# Altium PCB Ajchel_Jakub_plytka.PcbDoc
Units mm, origin at the board's own origin, x right, y up, seen from the top; angles counter-clockwise.
Board outline 95 x 67 mm, 2 copper layers (Top Layer, Bottom Layer), stack 1.571 mm thick; 48 components, 0 nets, 151 pads, 0 vias.
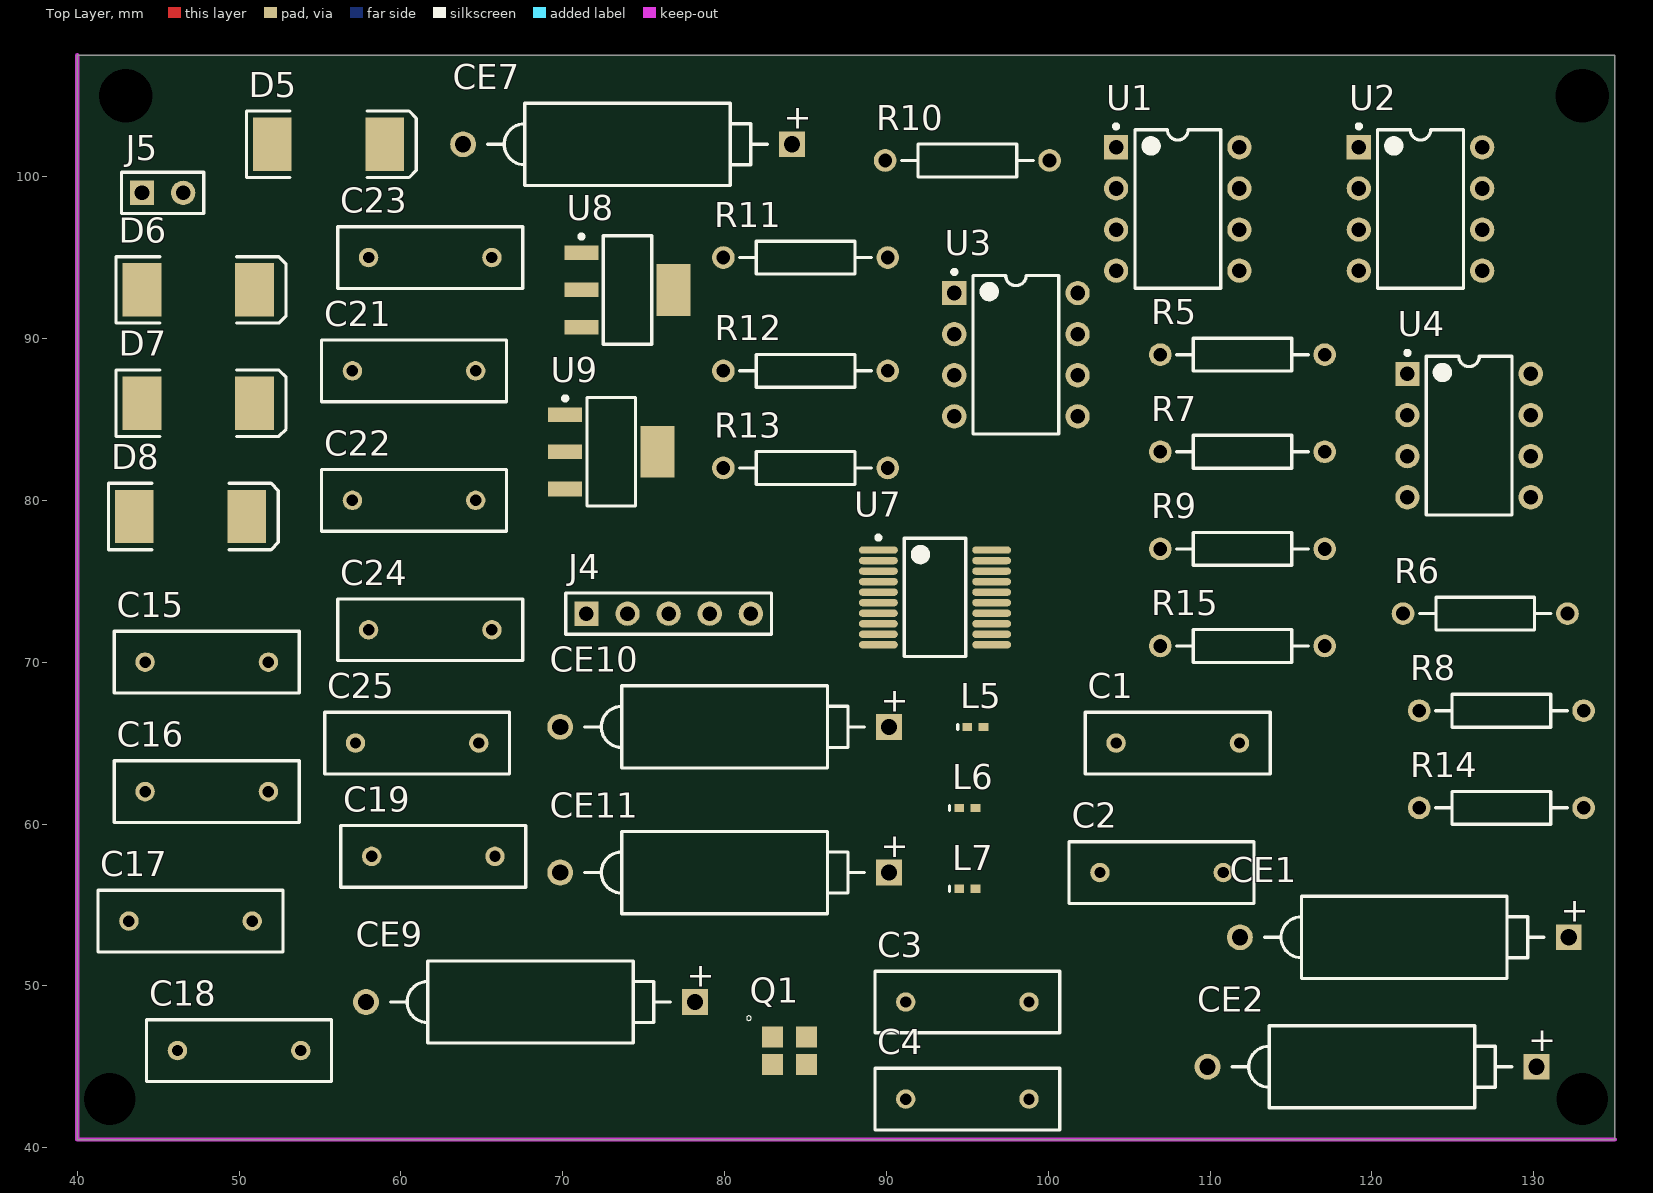
[diagram p0: Top Layer view]
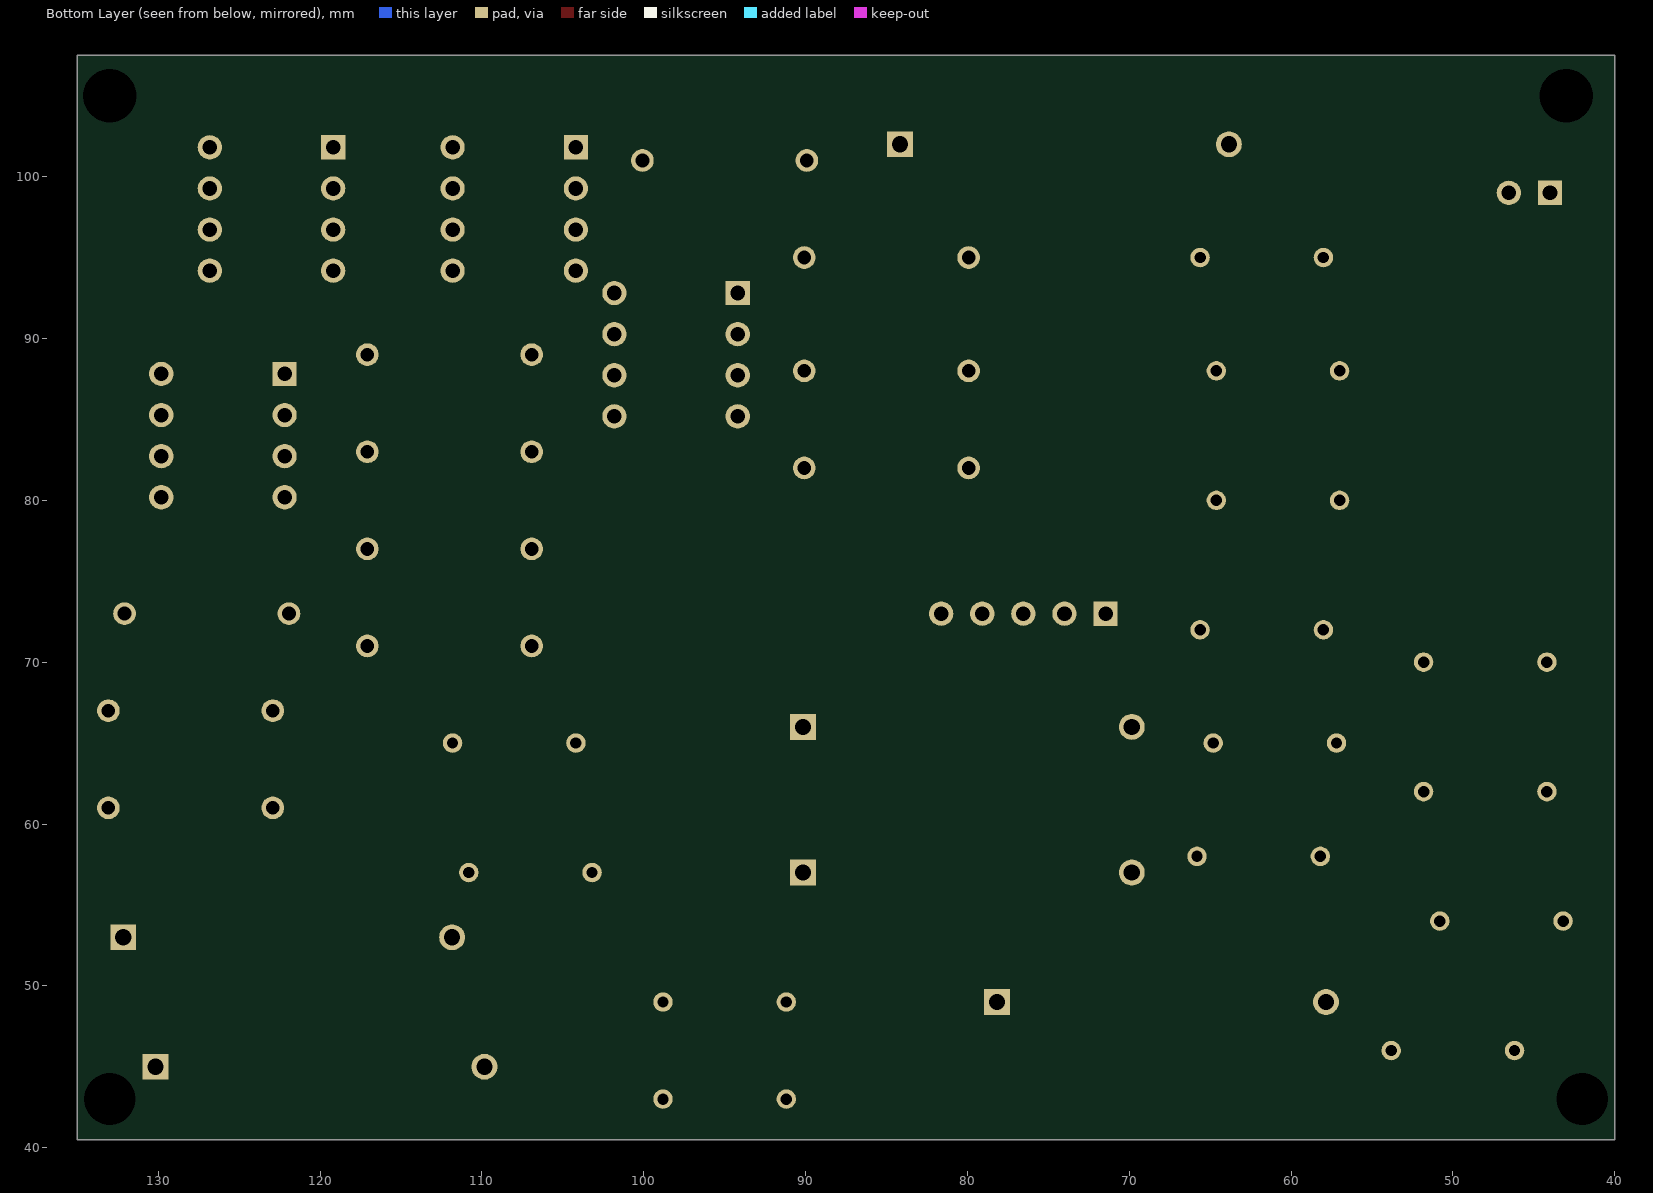
[diagram p1: Bottom Layer view, seen from below]

## Layer stack, top to bottom
Top Solder: solder mask 0.0102, Solder Resist, Dk 3.5
Top Layer: signal copper 0.0356
Dielectric 1: dielectric 1.5, FR-4, Dk 4.8
Bottom Layer: signal copper 0.0356
Bottom Solder: solder mask 0.0102, Solder Resist, Dk 3.5

## Board outline
40,40.5 40,107.5 135,107.5 135,40.5

## Design rules (kind name [scope] priority, off if disabled: settings)
Clearance [All] p1: gap=0.254 ignorepadtopadclearanceinfootprint=FALSE except(0: Arc-Hole Track-Hole SMDPad-Hole THPad-Hole Via-Hole Fill-Hole Poly-Hole Region-Hole Text-Hole)
PolygonConnect [All] p1: connectstyle=Relief reliefconductorwidth=0.254 reliefentries=4 polygonreliefangle="90 Angle" airgapwidth=0.254
RoutingVias [All] p1: holewidth=0.711 width=1.27 viastyle="Through Hole" minholewidth=0.711 minwidth=1.27 maxholewidth=0.711 maxwidth=1.27
SolderMaskExpansion [All] p1: expansion=0.102
Width [All] p1: maxlimit=0.254 minlimit=0.254 preferedwidth=0.254
30 further rules are at their usual default settings.

## Components (designator, comment, footprint, x,y, rotation, side; value= is the part's Value field where it differs from the comment)
C1 "Comment" RAD-0.3 108,65 r0 top
C2 "Comment" RAD-0.3 107,57 r0 top
C3 "Comment" RAD-0.3 95,49 r0 top
C4 "Comment" RAD-0.3 95,43 r0 top
C15 "Comment" RAD-0.3 48,70 r0 top
C16 "Comment" RAD-0.3 48,62 r0 top
C17 "Comment" RAD-0.3 47,54 r0 top
C18 "Comment" RAD-0.3 50,46 r0 top
C19 "Comment" RAD-0.3 62,58 r0 top
C21 "Comment" RAD-0.3 60.81,88 r0 top
C22 "Comment" RAD-0.3 60.81,80 r0 top
C23 "Comment" RAD-0.3 61.81,95 r0 top
C24 "Comment" RAD-0.3 61.81,72 r0 top
C25 "Comment" RAD-0.3 61,65 r0 top
CE1 "Comment" POLAR0.8 122,53 r0 top
CE2 "Comment" POLAR0.8 120,45 r0 top
CE7 "Comment" POLAR0.8 74,102 r0 top
CE9 "Comment" POLAR0.8 68,49 r0 top
CE10 "Comment" POLAR0.8 80,66 r0 top
CE11 "Comment" POLAR0.8 80,57 r0 top
D5 "Comment" SMC 55.525,102 r0 top
D6 "Comment" SMC 47.475,93 r0 top
D7 "Comment" SMC 47.475,86 r0 top
D8 "Comment" SMC 47,79 r0 top
J4 "Comment" HDR1X5 71.46,73 r0 top
J5 "Comment" HDR1X2 44,99 r0 top
L5 "Comment" 0402-A 95.5,66 r0 top
L6 "Comment" 0402-A 95,61 r0 top
L7 "Comment" 0402-A 95,56 r0 top
Q1 "Comment" "CTS 403" 84,46 r0 top
R5 "Comment" AXIAL-0.4 112,89 r0 top
R6 "Comment" AXIAL-0.4 127,73 r0 top
R7 "Comment" AXIAL-0.4 112,83 r0 top
R8 "Comment" AXIAL-0.4 128,67 r0 top
R9 "Comment" AXIAL-0.4 112,77 r0 top
R10 "Comment" AXIAL-0.4 95,101 r0 top
R11 "Comment" AXIAL-0.4 85,95 r0 top
R12 "Comment" AXIAL-0.4 85,88 r0 top
R13 "Comment" AXIAL-0.4 85,82 r0 top
R14 "Comment" AXIAL-0.4 128,61 r0 top
R15 "Comment" AXIAL-0.4 112,71 r0 top
U1 "Comment" DIP8 108,98 r0 top
U2 "Comment" DIP8 123,98 r0 top
U3 "Comment" DIP8 98,89 r0 top
U4 "Comment" DIP8 126,84 r0 top
U7 "Comment" SSOP20_M 93,74 r0 top
U8 "Comment" MP04A_L 74,93 r0 top
U9 "Comment" MP04A_L 73,83 r0 top

## Footprints (in the part's own frame and the unit in brackets; to place one, negate y for a bottom-side part, rotate by r counter-clockwise, add the part's x,y. Pads: shape width x height; smd on the part's side, far side on the other; paste and mask are expansions set on the pad)
0402-A [mm] "Chip Inductor, Body 1.0x0.5mm, IPC High Density"
  rect 0.6x0.5 smd: 1(-0.5,0) 2(0.5,0)
  silkscreen extent -1.1,-0.15 -1.1,0.15, body extent -0.55,-0.3 0.55,0.3, height 0.55
AXIAL-0.4 [mm] "Axial Device, Thru-Hole; 2 Leads; 0.4 in Pin Spacing"
  round 1.4 hole 0.85: 1(-5.08,0) 2(5.08,0)
  silkscreen extent -4.06,-1.02 4.06,1.02
"CTS 403" [mm]
  rect 1.3x1.3 smd: 1(-1.05,0.85) 2(-1.05,-0.85) 3(1.05,-0.85) 4(1.05,0.85)
  silkscreen extent -2.64,1.86 -2.36,2.14, body extent -1.6,-1.25 1.6,1.25, height 0.77
DIP8 [mm] "DIP, 8-Leads, Row Spacing 7.62mm, Pitch 2.54mm, Body 9.33x6.35mm"
  rect 1.5x1.5 hole 0.9: 1(-3.81,3.81)
  round 1.5 hole 0.9: 2(-3.81,1.27) 3(-3.81,-1.27) 4(-3.81,-3.81) 5(3.81,-3.81) 6(3.81,-1.27) 7(3.81,1.27) 8(3.81,3.81)
  silkscreen extent -3.93,-4.9 2.65,5.23, body extent -3.3,-4.9 3.3,4.9, height 5.08
HDR1X2 [mm] "Connector; Header; 2 Position"
  rect 1.5x1.5 hole 0.9: 1(0,0)
  round 1.5 hole 0.9: 2(2.54,0)
  silkscreen extent -1.27,-1.27 3.81,1.27
HDR1X5 [mm] "Connector; Header; 5 Position"
  rect 1.5x1.5 hole 0.9: 1(0,0)
  round 1.5 hole 0.9: 2(2.54,0) 3(5.08,0) 4(7.62,0) 5(10.16,0)
  silkscreen extent -1.27,-1.27 11.43,1.27
MP04A_L [mm] "SOT223, 4-Leads, Body 6.5x3.5mm, Pitch 2.3mm, Lead Span 7mm, IPC High Density"
  rect 2.1x0.9 smd: 1(-2.85,2.3) 2(-2.85,0) 3(-2.85,-2.3)
  rect 2.1x3.2 smd: 4(2.85,0)
  silkscreen extent -2.97,-3.35 1.5,3.42, body extent -1.86,-3.35 1.86,3.35, height 1.8
POLAR0.8 [mm] "Polarized Capacitor; 2 Leads"
  rect 1.6x1.6 hole 1: 1(10.16,0)
  round 1.6 hole 1: 2(-10.16,0)
  silkscreen extent -8.64,-2.54 8.64,2.54
RAD-0.3 [mm] "Radial Cap, Thru-Hole; 2 Leads; 0.3 in Pin Spacing"
  round 1.2 hole 0.7: 1(-3.81,0) 2(3.81,0)
  silkscreen extent -5.71,-1.91 5.71,1.91
SMC [mm] "DO-214-AB/SMC; 2 C-Bend Leads; Body 7.9 x 5.9 mm, inc. leads (LxW)"
  rect 2.4x3.3 smd: 1(-3.475,0) 2(3.475,0)
  silkscreen extent -5.07,-2.05 5.43,2.05
SSOP20_M [mm] "SOP, 20-Leads, Body 7.2x5.29mm, Pitch 0.65mm, IPC Low Density"
  oval 2.4x0.45 smd: 1(-3.5,2.925) 2(-3.5,2.275) 3(-3.5,1.625) 4(-3.5,0.975) 5(-3.5,0.325) 6(-3.5,-0.325) 7(-3.5,-0.975) 8(-3.5,-1.625) 9(-3.5,-2.275) 10(-3.5,-2.925) 11(3.5,-2.925) 12(3.5,-2.275) 13(3.5,-1.625) 14(3.5,-0.975) 15(3.5,-0.325) 16(3.5,0.325) 17(3.5,0.975) 18(3.5,1.625) 19(3.5,2.275) 20(3.5,2.925)
  silkscreen extent -3.62,-3.65 1.9,3.82, body extent -2.69,-3.66 2.69,3.67, height 1.98

## Part data
C15 C16 C17 C18 C19 C21 C22 C23 C24 C25: library part Cap, "Capacitor"
CE7 CE10 CE11: library part "Cap Pol2", "Polarized Capacitor (Axial)"
D5 D6 D7 D8: library part D-AK-2
J4: library part "Header 5", "Header, 5-Pin"
J5: library part "Header 2", "Header, 2-Pin"
L5 L6 L7: library part Inductor, "Inductor"
Q1: library part Oscilator12mhz, "Oscilator 12MHz"
R10 R11 R12 R13: library part Res2, "Resistor"
U7: library part WM8804
U8 U9: library part PM-REG-LM1086ADJ-SOT4

## Free pads (board coordinates)
  round 1.524 hole 3.3 unplated: 1(43,105) 4(133,105)
  round 1.524 hole 3.2 unplated: 2(42,43) 3(133,43)

## Nets (pads, with @x,y where several pads share a name; then routed paths per layer and width w, separated by ;. In a path a pad name is that pad's centre, name@x,y a point inside that pad or via, vN(x,y) a via of type N, cw(c..) or ccw(c..) an arc to the next point about the centre after c; other vN are vias at no path point)
pads on no net: C1.1 C1.2 C2.1 C2.2 C3.1 C3.2 C4.1 C4.2 C15.1 C15.2 C16.1 C16.2 C17.1 C17.2 C18.1 C18.2 C19.1 C19.2 C21.1 C21.2 C22.1 C22.2 C23.1 C23.2 C24.1 C24.2 C25.1 C25.2 CE1.1 CE1.2 CE2.1 CE2.2 CE7.1 CE7.2 CE9.1 CE9.2 CE10.1 CE10.2 CE11.1 CE11.2 D5.1 D5.2 D6.1 D6.2 D7.1 D7.2 D8.1 D8.2 J4.1 J4.2 J4.3 J4.4 J4.5 J5.1 J5.2 L5.1 L5.2 L6.1 L6.2 L7.1 L7.2 Q1.1 Q1.2 Q1.3 Q1.4 R5.1 R5.2 R6.1 R6.2 R7.1 R7.2 R8.1 R8.2 R9.1 R9.2 R10.1 R10.2 R11.1 R11.2 R12.1 R12.2 R13.1 R13.2 R14.1 R14.2 R15.1 R15.2 U1.1 U1.2 U1.3 U1.4 U1.5 U1.6 U1.7 U1.8 U2.1 U2.2 U2.3 U2.4 U2.5 U2.6 U2.7 U2.8 U3.1 U3.2 U3.3 U3.4 U3.5 U3.6 U3.7 U3.8 U4.1 U4.2 U4.3 U4.4 U4.5 U4.6 U4.7 U4.8 U7.1 U7.2 U7.3 U7.4 U7.5 U7.6 U7.7 U7.8 U7.9 U7.10 U7.11 U7.12 U7.13 U7.14 U7.15 U7.16 U7.17 U7.18 U7.19 U7.20 U8.1 U8.2 U8.3 U8.4 U9.1 U9.2 U9.3 U9.4

## Keep-outs
Top Layer:
  lines w0.254: 40,107.5 40,40.5 135,40.5

## Other copper
Top Layer:
  region: 69,89
  region: 69,89
  region: 69,89
  region: 69,89
  region: 69,89
  region: 69,89
  region: 69,89
  region: 69,89
  region: 69,89
  region: 69,89
  region: 69,89
  region: 69,89
  region: 69,89
  region: 69,89
  region: 69,89
  region: 69,89
  region: 59,86
  region: 59,86
  region: 59,86
  region: 53,102
  region: 53,102
  region: 53,102

## Text inside footprints (layer, text, board x,y; h text height)
CE1: Top Overlay "+" at 131.652,53.95 h1.5
CE2: Top Overlay "+" at 129.652,45.95 h1.5
CE7: Top Overlay "+" at 83.652,102.95 h1.5
CE9: Top Overlay "+" at 77.652,49.95 h1.5
CE10: Top Overlay "+" at 89.652,66.95 h1.5
CE11: Top Overlay "+" at 89.652,57.95 h1.5